# Altium PCB PCB-MM-08-FPS-400-CSW.PcbDoc
Units mm, origin at the board's own origin, x right, y up, seen from the top; angles counter-clockwise.
Board outline 57.02 x 82.04 mm, 2 copper layers (Top Layer, Bottom Layer); 89 components, 61 nets, 291 pads, 108 vias.
Unrouted connection lines stored in the file: 70.
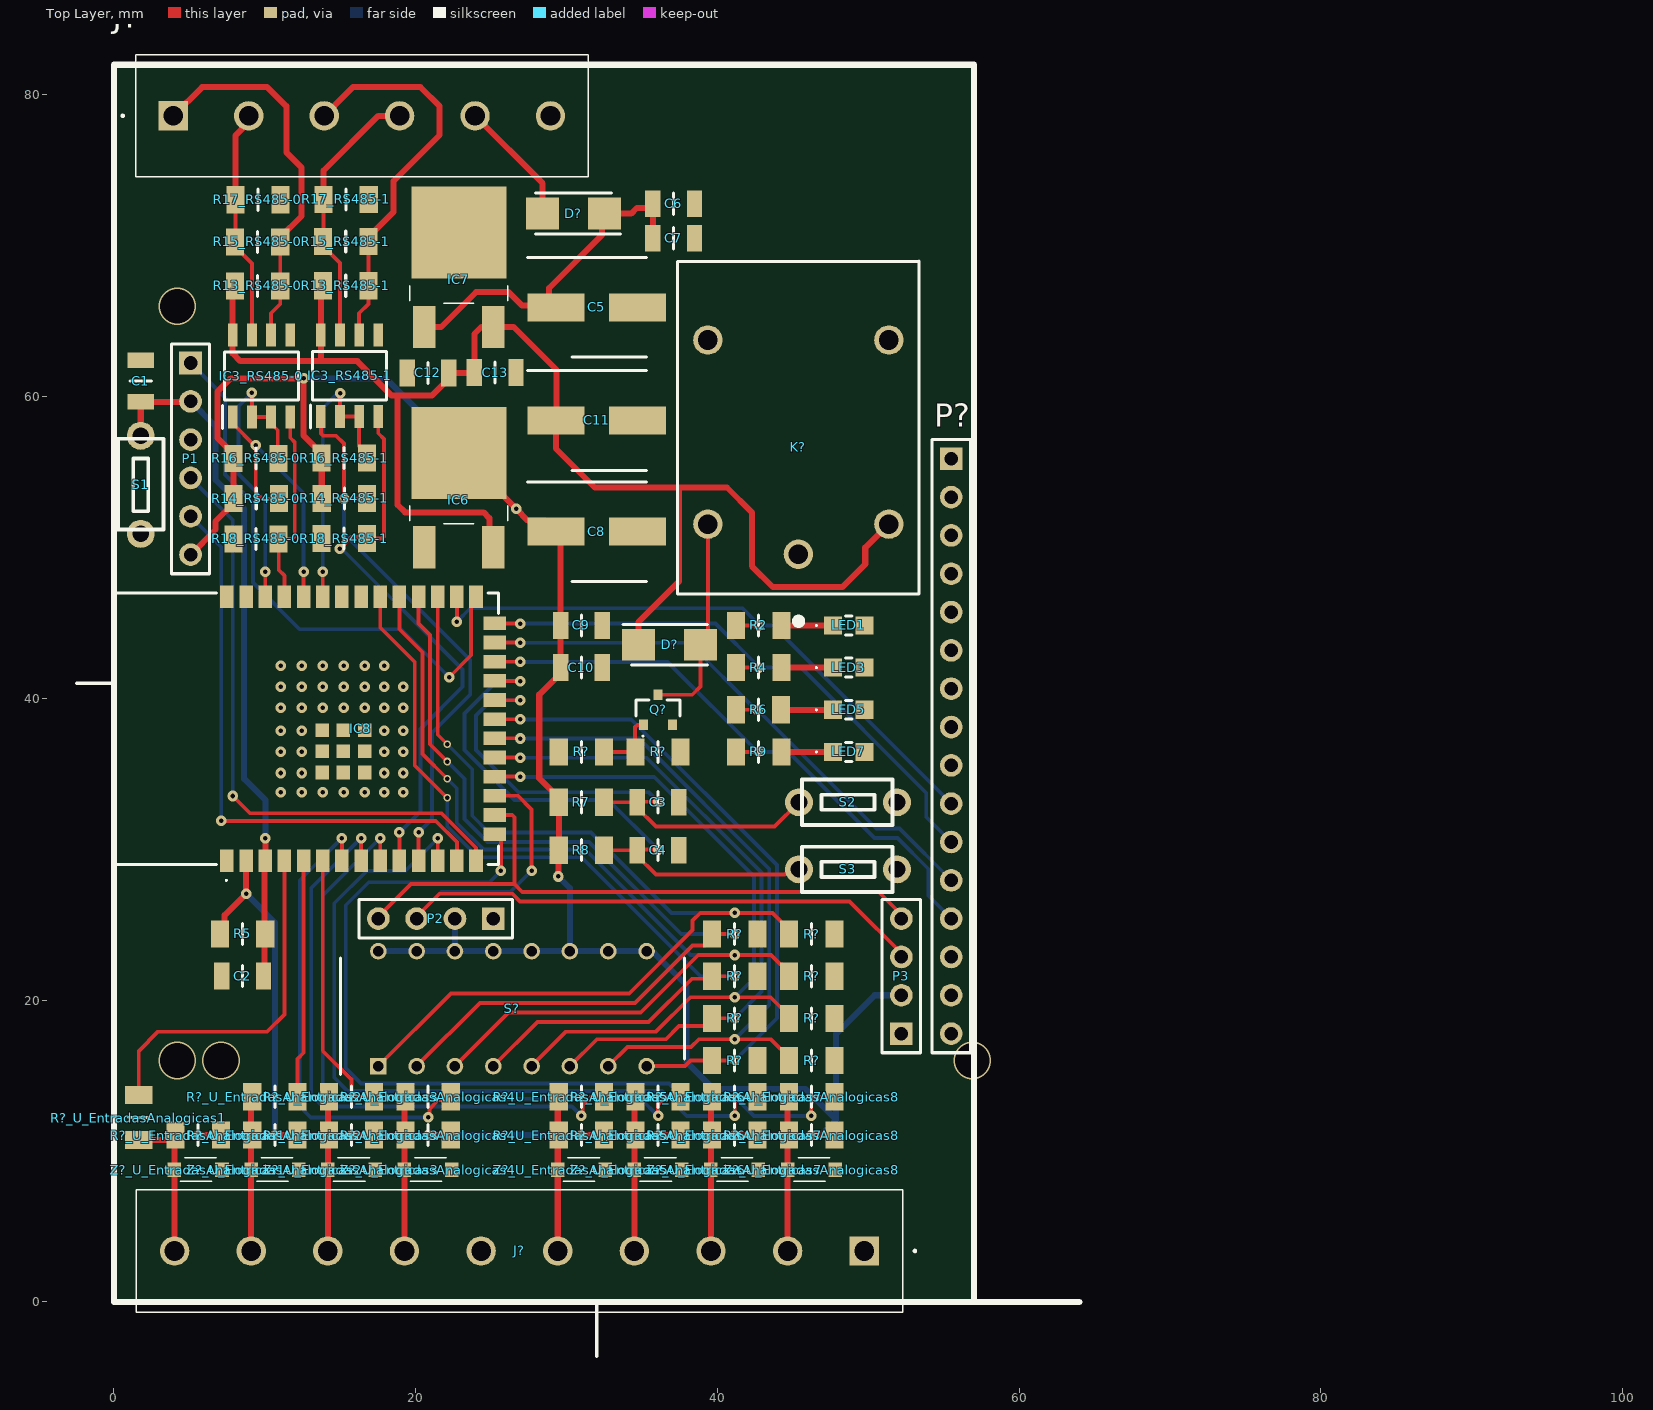
[diagram p0: Top Layer view]
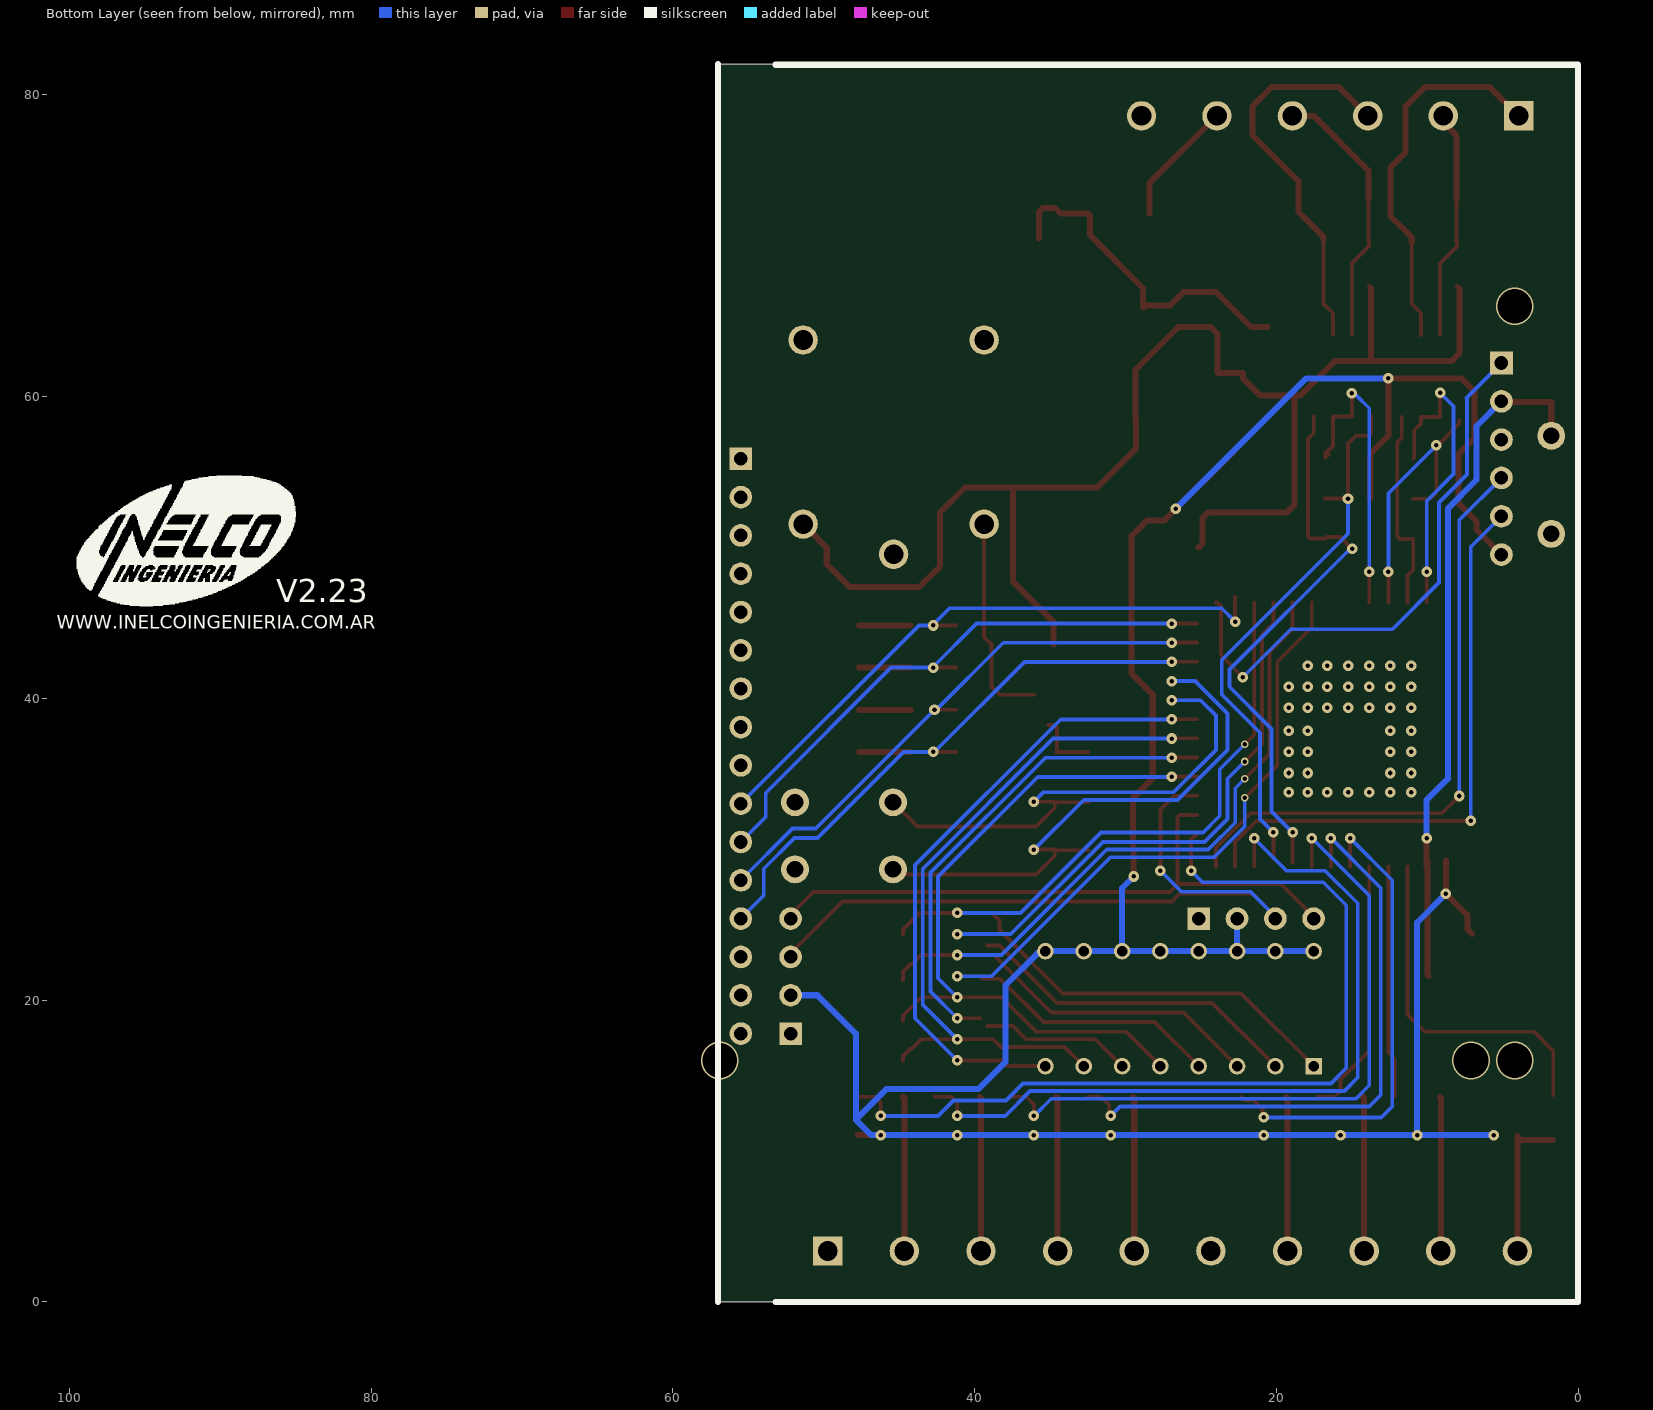
[diagram p1: Bottom Layer view, seen from below]
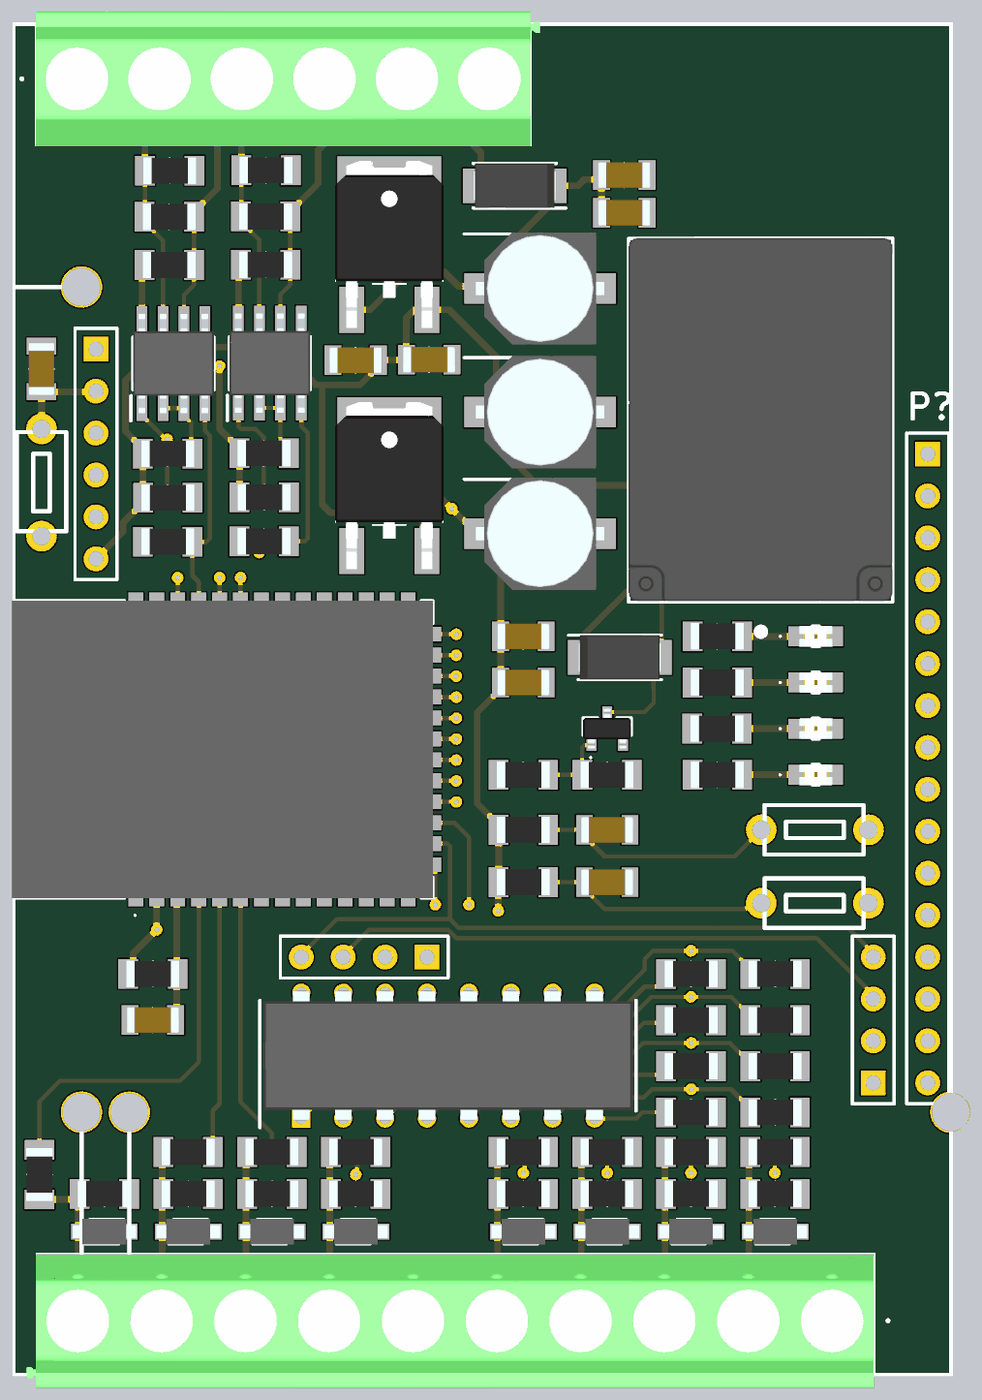
[diagram p2: 3D render of the assembled board from above, using the file's embedded part models]

## Layer stack, top to bottom
Top Solder: solder mask 0.0102, Solder Resist, Dk 3.5
Top Layer: signal copper 0.0356
Dielectric 1: dielectric 0.32, FR-4, Dk 4.8
Bottom Layer: signal copper 0.0356
Bottom Solder: solder mask 0.0102, Solder Resist, Dk 3.5

## Board outline
0,0 57.023,0 57.023,82.042 0,82.042

## Design rules (kind name [scope] priority, off if disabled: settings)
Clearance [All] p1: gap=0.254 ignorepadtopadclearanceinfootprint=FALSE except(0: Arc-Hole Track-Hole SMDPad-Hole THPad-Hole Via-Hole Fill-Hole Poly-Hole Region-Hole Text-Hole; 0.5: THPad-Fill THPad-Poly THPad-Region)
PlaneClearance [All] p1: clearance=2
PlaneConnect [All] p1: planeconnectstyle=Direct reliefexpansion=0.508 reliefentries=4 reliefconductorwidth=0.254 reliefairgap=0.254
PolygonConnect [All] p1: connectstyle=Direct reliefconductorwidth=0.4 reliefentries=4 polygonreliefangle="90 Angle" airgapwidth=0.254
RoomDefinition RS485-0 [InComponentClass('RS485-0')] p1: confinementstyle=ConfineIn formatcopy=TRUE lockcomponents=FALSE outline 6.742,48.897 12.584,48.897 12.584,74.424 6.742,74.424
RoomDefinition RS485-1 [InComponentClass('RS485-1')] p2: confinementstyle=ConfineIn formatcopy=TRUE lockcomponents=FALSE outline 12.584,48.918 18.426,48.918 18.426,74.445 12.584,74.445
RoutingVias [All] p1: holewidth=0.711 width=1.27 viastyle="Through Hole" minholewidth=0.3 minwidth=0.5 maxholewidth=0.711 maxwidth=1.27
SolderMaskExpansion [All] p1: expansion=0.102 istentingtop=FALSE
Width [All] p1: maxlimit=1 minlimit=0.254 preferedwidth=0.4
28 further rules are at their usual default settings.

## Classes and differential pairs
component class U_RELAY: D? K? Q? R?
channel class EntradasAnalogicas: U_EntradasAnalogicas1 U_EntradasAnalogicas2 U_EntradasAnalogicas3 U_EntradasAnalogicas4 U_EntradasAnalogicas5 U_EntradasAnalogicas6 U_EntradasAnalogicas7 U_EntradasAnalogicas8
component class U_EntradasAnalogicas8: R?_U_EntradasAnalogicas8 Z?_U_EntradasAnalogicas8
component class U_EntradasAnalogicas7: R?_U_EntradasAnalogicas7 Z?_U_EntradasAnalogicas7
component class U_EntradasAnalogicas6: R?_U_EntradasAnalogicas6 Z?_U_EntradasAnalogicas6
component class U_EntradasAnalogicas5: R?_U_EntradasAnalogicas5 Z?_U_EntradasAnalogicas5
component class U_EntradasAnalogicas4: R?_U_EntradasAnalogicas4 Z?_U_EntradasAnalogicas4
component class U_EntradasAnalogicas3: R?_U_EntradasAnalogicas3 Z?_U_EntradasAnalogicas3
component class U_EntradasAnalogicas2: R?_U_EntradasAnalogicas2 Z?_U_EntradasAnalogicas2
component class U_EntradasAnalogicas1: R?_U_EntradasAnalogicas1 Z?_U_EntradasAnalogicas1
component class U_Pulsadores: C1 C2 C3 C4 R5 R7 R8 S1 S2 S3
component class U_Leds: LED1 LED3 LED5 LED7 R2 R4 R6 R9
component class U_Conectores: J? P1 P2 P3
component class "MM-08 FPS-400": IC8 P? R? S?
component class U_Fuente: C5 C6 C7 C8 C9 C10 C11 C12 C13 D? IC6 IC7
channel class RS485: RS485-0 RS485-1 RS485-2
component class RS485-0: IC3_RS485-0 R13_RS485-0 R14_RS485-0 R15_RS485-0 R16_RS485-0 R17_RS485-0 R18_RS485-0
component class RS485-1: IC3_RS485-1 R13_RS485-1 R14_RS485-1 R15_RS485-1 R16_RS485-1 R17_RS485-1 R18_RS485-1

## Components (designator, comment, footprint, x,y, rotation, side; value= is the part's Value field where it differs from the comment)
C1 "0.1uF" CAPC3216X100N 1.778,61.034 r90 top
C2 "1uF" CAPC3216X100N 8.533,21.59 r0 top
C3 "1uF" CAPC3216X100N 36.068,33.112 r180 top
C4 "1uF" CAPC3216X100N 36.068,29.937 r180 top
C5 "100uFX16V" CAPAE660X550N 32.004,65.913 r0 top
C6 "10uF/16V(10%)" CAPC3216X100N 37.103,72.786 r0 top
C7 "0.1uF/16V(10%)" CAPC3216X100N 37.103,70.5 r0 top
C8 "100uFX16V" CAPAE660X550N 32.004,51.054 r0 top
C9 "10uF/16V(10%)" CAPC3216X100N 30.988,44.831 r0 top
C10 "0.1uF/16V(10%)" CAPC3216X100N 30.988,42.037 r0 top
C11 "100uFX16V" CAPAE660X550N 32.004,58.42 r0 top
C12 "10uF/16V(10%)" CAPC3216X100N 20.816,61.568 r180 top
C13 "0.1uF/16V(10%)" CAPC3216X100N 25.273,61.595 r0 top
D? "M7A" DIOM5027X262N 36.83,43.561 r0 top
D? "M7A" DIOM5027X262N 30.462,72.136 r180 top
IC3_RS485-0 "SN75176AD" SOIC127P600X175-8N 9.779,61.365 r90 top (schematic designator IC3)
IC3_RS485-1 "SN75176AD" SOIC127P600X175-8N 15.621,61.386 r90 top (schematic designator IC3)
IC6 "LD1117DT33CTR" L7805CDTTR 22.86,56.261 r0 top
IC7 "L7805CDT-TR" L7805CDTTR 22.86,70.866 r0 top
IC8 "ESP32-S3-WROOM-1-N4" ESP32S3WROOM1N4 12.753,37.986 r90 top
J? "1729050" 1729050 3.937,78.613 r0 top
J? "1729209" 1729209 49.739,3.369 r180 top
K? "JS1-12V-F" JS1-12V-F_1 53.37,46.905 r90 top
LED1 "APHCM2012SURCK-F01" APHCM2012SURCKF01 48.71,44.831 r0 top
LED3 "APHCM2012SURCK-F01" APHCM2012SURCKF01 48.71,42.037 r0 top
LED5 "APHCM2012SURCK-F01" APHCM2012SURCKF01 48.71,39.243 r0 top
LED7 "APHCM2012SURCK-F01" APHCM2012SURCKF01 48.71,36.449 r0 top
P1 "Header 6" HDR1X6 5.08,62.23 r270 top
P2 "I2C" HDR1X4 25.146,25.4 r180 top
P3 "RTC" HDR1X4 52.197,17.78 r90 top locked
P? "Header 16" HDR1X16 55.499,55.88 r270 top
Q? "BC817-40" BC81740215 36.068,39.243 r0 top
R2 "1K" RESC3216X75N 42.741,44.831 r0 top
R4 "1K" RESC3216X75N 42.741,42.037 r0 top
R5 "10K" RESC3216X75N 8.533,24.384 r180 top
R6 "1K" RESC3216X75N 42.73,39.243 r0 top
R7 "10K" RESC3216X75N 30.988,33.112 r180 top
R8 "10K" RESC3216X75N 30.988,29.937 r180 top
R9 "1K" RESC3216X75N 42.741,36.449 r0 top
R13_RS485-0 "20K" RESC3216X75N 9.525,67.334 r0 top (schematic designator R13)
R13_RS485-1 "20K" RESC3216X75N 15.367,67.355 r0 top (schematic designator R13)
R14_RS485-0 "10K" RESC3216X75N 9.435,53.237 r0 top (schematic designator R14)
R14_RS485-1 "10K" RESC3216X75N 15.277,53.258 r0 top (schematic designator R14)
R15_RS485-0 "120" RESC3216X75N 9.525,70.255 r180 top (schematic designator R15)
R15_RS485-1 "120" RESC3216X75N 15.367,70.276 r180 top (schematic designator R15)
R16_RS485-0 "1K" RESC3216X75N 9.422,55.904 r0 top (schematic designator R16)
R16_RS485-1 "1K" RESC3216X75N 15.264,55.925 r0 top (schematic designator R16)
R17_RS485-0 "20K" RESC3216X75N 9.549,73.049 r180 top (schematic designator R17)
R17_RS485-1 "20K" RESC3216X75N 15.391,73.07 r180 top (schematic designator R17)
R18_RS485-0 "10K" RESC3216X75N 9.422,50.57 r180 top (schematic designator R18)
R18_RS485-1 "10K" RESC3216X75N 15.264,50.591 r180 top (schematic designator R18)
R? "1K" RESC3216X75N 30.988,36.449 r0 top
R? "10K" RESC3216X75N 36.068,36.449 r180 top
R? "1K" RESC3216X75N 41.148,18.785 r0 top
R? "1K" RESC3216X75N 41.148,21.579 r0 top
R? "1K" RESC3216X75N 46.252,21.579 r0 top
R? "1K" RESC3216X75N 46.252,18.785 r0 top
R? "1K" RESC3216X75N 46.252,15.991 r0 top
R? "1K" RESC3216X75N 46.252,24.373 r0 top
R? "1K" RESC3216X75N 41.148,15.991 r0 top
R? "1K" RESC3216X75N 41.148,24.373 r0 top
R?_U_EntradasAnalogicas1 "39k" RESC3216X75N 1.651,12.216 r90 top (schematic designator R?)
R?_U_EntradasAnalogicas1 "2k7" RESC3216X75N 5.588,11.049 r0 top (schematic designator R?)
R?_U_EntradasAnalogicas2 "2k7" RESC3216X75N 10.668,11.049 r0 top (schematic designator R?)
R?_U_EntradasAnalogicas2 "39k" RESC3216X75N 10.668,13.589 r0 top (schematic designator R?)
R?_U_EntradasAnalogicas3 "2k7" RESC3216X75N 15.748,11.049 r0 top (schematic designator R?)
R?_U_EntradasAnalogicas3 "39k" RESC3216X75N 15.748,13.589 r0 top (schematic designator R?)
R?_U_EntradasAnalogicas4 "39k" RESC3216X75N 20.828,13.589 r0 top (schematic designator R?)
R?_U_EntradasAnalogicas4 "2k7" RESC3216X75N 20.828,11.049 r0 top (schematic designator R?)
R?_U_EntradasAnalogicas5 "39k" RESC3216X75N 30.988,13.589 r0 top (schematic designator R?)
R?_U_EntradasAnalogicas5 "2k7" RESC3216X75N 30.988,11.049 r0 top (schematic designator R?)
R?_U_EntradasAnalogicas6 "39k" RESC3216X75N 36.068,13.589 r0 top (schematic designator R?)
R?_U_EntradasAnalogicas6 "2k7" RESC3216X75N 36.068,11.049 r0 top (schematic designator R?)
R?_U_EntradasAnalogicas7 "2k7" RESC3216X75N 41.148,11.049 r0 top (schematic designator R?)
R?_U_EntradasAnalogicas7 "39k" RESC3216X75N 41.148,13.589 r0 top (schematic designator R?)
R?_U_EntradasAnalogicas8 "2k7" RESC3216X75N 46.252,11.049 r0 top (schematic designator R?)
R?_U_EntradasAnalogicas8 "39k" RESC3216X75N 46.252,13.589 r0 top (schematic designator R?)
S1 "1825965-1" "TAC-SWITCH 2CONT. 3,5X6MM" 1.778,57.404 r270 top
S2 "1825965-1" "TAC-SWITCH 2CONT. 3,5X6MM" 45.408,33.112 r0 top
S3 "1825965-1" "TAC-SWITCH 2CONT. 3,5X6MM" 45.408,28.667 r0 top
S? "A6D-8100" DIP762W50P254L2240H460Q16N 26.416,19.431 r90 top
Z?_U_EntradasAnalogicas1 "MMSZ5226B-7-F" MMSZ5226B7F 5.588,8.763 r0 top (schematic designator Z?)
Z?_U_EntradasAnalogicas2 "MMSZ5226B-7-F" MMSZ5226B7F 10.668,8.763 r0 top (schematic designator Z?)
Z?_U_EntradasAnalogicas3 "MMSZ5226B-7-F" MMSZ5226B7F 15.748,8.763 r0 top (schematic designator Z?)
Z?_U_EntradasAnalogicas4 "MMSZ5226B-7-F" MMSZ5226B7F 20.828,8.763 r0 top (schematic designator Z?)
Z?_U_EntradasAnalogicas5 "MMSZ5226B-7-F" MMSZ5226B7F 30.988,8.763 r0 top (schematic designator Z?)
Z?_U_EntradasAnalogicas6 "MMSZ5226B-7-F" MMSZ5226B7F 36.068,8.763 r0 top (schematic designator Z?)
Z?_U_EntradasAnalogicas7 "MMSZ5226B-7-F" MMSZ5226B7F 41.148,8.763 r0 top (schematic designator Z?)
Z?_U_EntradasAnalogicas8 "MMSZ5226B-7-F" MMSZ5226B7F 46.252,8.763 r0 top (schematic designator Z?)

## Footprints (in the part's own frame and the unit in brackets; to place one, negate y for a bottom-side part, rotate by r counter-clockwise, add the part's x,y. Pads: shape width x height; smd on the part's side, far side on the other; paste and mask are expansions set on the pad)
1729050 [mm]
  rect 1.95x1.95 hole 1.3: 1(0,0)
  round 1.95 hole 1.3: 2(5,0) 3(10,0) 4(15,0) 5(20,0) 6(25,0)
  silkscreen extent -3.4,-4.05 27.5,4.05, body extent -2.51,-4.08 28.06,4.07, height 10.53
1729209 [mm]
  rect 1.95x1.95 hole 1.3: 1(0,0)
  round 1.95 hole 1.3: 2(5.08,0) 3(10.16,0) 4(15.24,0) 5(20.32,0) 6(25.4,0) 7(30.48,0) 8(35.56,0) 9(40.64,0) 10(45.72,0)
  silkscreen extent -3.4,-4.08 48.26,4.08, body extent -2.5,-4.01 48.87,4.09, height 10.39
APHCM2012SURCKF01 [mm]
  rect 1.2x1.2 smd: 1(-1.05,0) 2(1.05,0)
  silkscreen extent -2.2,-0.63 0.2,0.63, body extent -1,-0.63 1,0.63, height 0.5
BC81740215 [mm]
  rect 0.6x0.7 smd: 1(-0.95,-1) 2(0.95,-1) 3(0,1)
  silkscreen extent -1.45,-1.8 1.45,0.65, body extent -1.45,-1.2 1.45,1.2, height 0.95
CAPAE660X550N [mm]
  rect 3.8x1.85 smd: 1(-2.7,0) 2(2.7,0)
  silkscreen extent -4.6,-3.3 3.3,3.3, body extent -3.9,-3.4 3.9,3.4, height 5.5
CAPC3216X100N [mm]
  rect 1.02x1.78 smd: 1(-1.38,0) 2(1.38,0)
  silkscreen extent 0,-0.7 0,0.7, body extent -1.6,-0.8 1.6,0.8, height 1
DIOM5027X262N [mm]
  rect 2.2x2.1 smd: 1(-2.05,0) 2(2.05,0)
  silkscreen extent -3.1,-1.35 2.52,1.35, body extent -2.52,-1.35 2.52,1.35, height 2.62
DIP762W50P254L2240H460Q16N [mm]
  rect 1.1x1.1 hole 0.7: 1(-3.81,8.89)
  round 1.1 hole 0.7: 2(-3.81,6.35) 3(-3.81,3.81) 4(-3.81,1.27) 5(-3.81,-1.27) 6(-3.81,-3.81) 7(-3.81,-6.35) 8(-3.81,-8.89) 9(3.81,-8.89) 10(3.81,-6.35) 11(3.81,-3.81) 12(3.81,-1.27) 13(3.81,1.27) 14(3.81,3.81) 15(3.81,6.35) 16(3.81,8.89)
  silkscreen extent -4.36,-11.4 3.35,11.4, body extent -3.94,-11.2 3.94,11.2, height 4.6
ESP32S3WROOM1N4 [mm]
  rect 1.5x0.9 smd: 1(-8.75,5.26) 2(-8.75,3.99) 3(-8.75,2.72) 4(-8.75,1.45) 5(-8.75,0.18) 6(-8.75,-1.09) 7(-8.75,-2.36) 8(-8.75,-3.63) 9(-8.75,-4.9) 10(-8.75,-6.17) 11(-8.75,-7.44) 12(-8.75,-8.71) 13(-8.75,-9.98) 14(-8.75,-11.25) 27(8.75,-11.25) 28(8.75,-9.98) 29(8.75,-8.71) 30(8.75,-7.44) 31(8.75,-6.17) 32(8.75,-4.9) 33(8.75,-3.63) 34(8.75,-2.36) 35(8.75,-1.09) 36(8.75,0.18) 37(8.75,1.45) 38(8.75,2.72) 39(8.75,3.99) 40(8.75,5.26)
  rect 0.9x1.5 smd: 15(-6.985,-12.5) 16(-5.715,-12.5) 17(-4.445,-12.5) 18(-3.175,-12.5) 19(-1.905,-12.5) 20(-0.635,-12.5) 21(0.635,-12.5) 22(1.905,-12.5) 23(3.175,-12.5) 24(4.445,-12.5) 25(5.715,-12.5) 26(6.985,-12.5)
  rect 0.9x0.9 smd: 41(-1.5,-2.46) 42(-2.9,-1.06) 43(-2.9,-2.46) 44(-2.9,-3.86) 45(-1.5,-3.86) 46(-0.1,-3.86) 47(-0.1,-2.46) 48(-0.1,-1.06) 49(-1.5,-1.06)
  silkscreen extent -10.1,-12.75 9,12.75, body extent -9,-12.75 9,12.75, height 3.35
HDR1X4 [mm] "Connector; Header; 4 Position"
  rect 1.5x1.5 hole 0.9: 1(0,0)
  round 1.5 hole 0.9: 2(2.54,0) 3(5.08,0) 4(7.62,0)
  silkscreen extent -1.27,-1.27 8.89,1.27
HDR1X6 [mm] "Connector; Header; 6 Position"
  rect 1.5x1.5 hole 0.9: 1(0,0)
  round 1.5 hole 0.9: 2(2.54,0) 3(5.08,0) 4(7.62,0) 5(10.16,0) 6(12.7,0)
  silkscreen extent -1.27,-1.27 13.97,1.27
HDR1X16 [mm] "Connector; Header; 16 Position"
  rect 1.5x1.5 hole 0.9: 1(0,0)
  round 1.5 hole 0.9: 2(2.54,0) 3(5.08,0) 4(7.62,0) 5(10.16,0) 6(12.7,0) 7(15.24,0) 8(17.78,0) 9(20.32,0) 10(22.86,0) 11(25.4,0) 12(27.94,0) 13(30.48,0) 14(33.02,0) 15(35.56,0) 16(38.1,0)
  silkscreen extent -1.27,-1.27 39.37,1.27
JS1-12V-F_1 [mm]
  round 1.95 hole 1.3: 1(2.649,8) 2(4.649,14) 3(16.849,14) 4(16.849,2) 5(4.649,2)
  silkscreen extent -1.98,0 22.07,16, body extent 0.07,0 22.07,16, height 16.9
L7805CDTTR [mm]
  rect 1.5x2.8 smd: 1(-2.286,-6.25) 3(2.286,-6.25)
  rect 6.3x6.1 smd: 2(0,0)
  silkscreen extent -3.25,-4.68 3.25,-3.5, body extent -3.3,-7.38 3.3,2.78, height 2.63
MMSZ5226B7F [mm]
  rect 0.9x0.95 smd: 1(-1.575,0) 2(1.575,0)
  silkscreen extent -1.2,-0.77 1.2,0.77, body extent -1.93,-0.77 1.93,0.77, height 1.55
RESC3216X75N [mm]
  rect 1.2x1.8 smd: 1(-1.5,0) 2(1.5,0)
  silkscreen extent 0,-0.7 0,0.7, body extent -1.6,-0.8 1.6,0.8, height 0.75
SOIC127P600X175-8N [mm]
  rect 1.525x0.65 smd: 1(-2.712,1.905) 2(-2.712,0.635) 3(-2.712,-0.635) 4(-2.712,-1.905) 5(2.712,-1.905) 6(2.712,-0.635) 7(2.712,0.635) 8(2.712,1.905)
  silkscreen extent -3.47,-2.45 1.6,2.58, body extent -3,-2.45 3,2.45, height 1.75
"TAC-SWITCH 2CONT. 3,5X6MM" [mm]
  round 1.85 hole 1.1: 1(0,0) 2(6.5,0)
  silkscreen extent 0.2,-1.5 6.2,1.5

## Part data
C1 C2 C3 C4 C6 C7 C9 C10 C12 C13: library part CL31B104KBCNNNC, "100NFX50V X7R 10% CER.MULT. SMD 1206", Manufacturer_Name="Samsung Electro-Mechanics", Mouser Part Number=187-CL31B104KBCNNNC, Arrow Part Number=CL31B104KBCNNNC, Arrow Price/Stock=https://www.arrow.com/en/products/cl31b104kbcnnnc/samsung-electro-mechanics?region=nac, Datasheet Link=https://datasheet.datasheetarchive.com/originals/distributors/Datasheets_SAMA/0fdb6a11e020a7299f4d0713dd2bd7ee.pdf, Height=1mm, Manufacturer_Part_Number=CL31B104KBCNNNC, Mouser Price/Stock=https://www.mouser.co.uk/ProductDetail/Samsung-Electro-Mechanics/CL31B104KBCNNNC?qs=349EhDEZ59oHABbyGq1iKA%3D%3D
C5 C8 C11: library part NACE101M16V6.3X5.5TR13F, "100UFX16V 20%. 6.3x5.4 ELE.RAD.SMD", Manufacturer_Name="NIC Components", Arrow Part Number=NACE101M16V6.3X5.5TR13F, Arrow Price/Stock=https://www.arrow.com/en/products/nace101m16v6.3x5.5tr13f/nic-components, Datasheet Link=http://uk.rs-online.com/web/p/products/7379631, Height=5.5mm, Manufacturer_Part_Number=NACE101M16V6.3X5.5TR13F
D? D?: "Diode", Manufacturer_Name="HY Electronic", Height=2.62mm, Manufacturer_Part_Number=M7A
IC3_RS485-0 IC3_RS485-1: "Integrated Circuit", Manufacturer_Name="Texas Instruments", Mouser Part Number=595-SN75176AD, Arrow Part Number=SN75176AD, Arrow Price/Stock=https://www.arrow.com/en/products/sn75176ad/texas-instruments?region=nac, Datasheet Link=http://www.ti.com/lit/ds/symlink/sn75176a.pdf, Height=1.75mm, Manufacturer_Part_Number=SN75176AD, Mouser Price/Stock=https://www.mouser.co.uk/ProductDetail/Texas-Instruments/SN75176AD?qs=FetendrIl6upbSVFRObzhQ%3D%3D
IC6: "TO-252-3/DPACK 0.95A 3.3V", Manufacturer_Name=STMicroelectronics, Mouser Part Number=511-LD1117DT33C-TR, Arrow Part Number=LD1117DT33CTR, Arrow Price/Stock=https://www.arrow.com/en/products/ld1117dt33ctr/stmicroelectronics?region=nac, Datasheet Link=https://www.st.com/resource/en/datasheet/ld1117.pdf, Height=2.48mm, Manufacturer_Part_Number=LD1117DT33CTR, Mouser Price/Stock=https://www.mouser.co.uk/ProductDetail/STMicroelectronics/LD1117DT33CTR?qs=rUxiu3TV3%2FNm%2FOyb7vJzpg%3D%3D
IC7: "Integrated Circuit", Manufacturer_Name=STMicroelectronics, Mouser Part Number=511-L7805CDT-TR, Arrow Part Number=L7805CDT-TR, Arrow Price/Stock=https://www.arrow.com/en/products/l7805cdt-tr/stmicroelectronics?region=europe, Datasheet Link=https://componentsearchengine.com/Datasheets/2/L7805CDT-TR.pdf, Height=2.63mm, Manufacturer_Part_Number=L7805CDT-TR, Mouser Price/Stock=https://www.mouser.co.uk/ProductDetail/STMicroelectronics/L7805CDT-TR?qs=gq%2F78KzUDX67VndS%2FbSB4Q%3D%3D
IC8: "Integrated Circuit", Manufacturer_Name="Espressif Systems", Mouser Part Number=356-ESP32-S3WROOM1N4, Datasheet Link=https://www.espressif.com/sites/default/files/documentation/esp32-s3-wroom-1_wroom-1u_datasheet_en.pdf, Height=3.25mm, Manufacturer_Part_Number=ESP32-S3-WROOM-1-N4, Mouser Price/Stock=https://www.mouser.co.uk/ProductDetail/Espressif-Systems/ESP32-S3-WROOM-1-N4?qs=Li%252BoUPsLEnsO%2FkiJOUK0FQ%3D%3D
J?: "Connector", Manufacturer_Name="Phoenix Contact", Mouser Part Number=651-1729050, Arrow Part Number=1729050, Arrow Price/Stock=https://www.arrow.com/en/products/1729050/phoenix-contact?region=nac, Datasheet Link=http://www.phoenixcontact.com/de/produkte/1729050/pdf, Height=10.15mm, Manufacturer_Part_Number=1729050, Mouser Price/Stock=https://www.mouser.co.uk/ProductDetail/Phoenix-Contact/1729050?qs=cq3Rj917t3laRrRfXpB0kg%3D%3D
J?: "Connector", Manufacturer_Name="Phoenix Contact", Mouser Part Number=651-1729209, Datasheet Link=http://www.phoenixcontact.com/de/produkte/1729209/pdf, Height=10.15mm, Manufacturer_Part_Number=1729209, Mouser Price/Stock=https://www.mouser.co.uk/ProductDetail/Phoenix-Contact/1729209?qs=DAHzmYU9cu26iNG3nw7bXQ%3D%3D
K?: "Relay or Contactor", Manufacturer_Name=Panasonic, Mouser Part Number=769-JS1-12V-F, Arrow Part Number=JS1-12V-F, Arrow Price/Stock=https://www.arrow.com/en/products/js1-12v-f/panasonic, Datasheet Link=https://datasheet.datasheetarchive.com/originals/distributors/Datasheets-24/DSA-473864.pdf, Manufacturer_Part_Number=JS1-12V-F, Mouser Price/Stock=https://www.mouser.co.uk/ProductDetail/Panasonic-Industrial-Devices/JS1-12V-F?qs=UO%2Fx91QLkSAl%252Bp0dnjREtA%3D%3D
LED1 LED3 LED5 LED7: "LED", Manufacturer_Name=Kingbright, Mouser Part Number=604-APHCM2012SURCK, Arrow Part Number=APHCM2012SURCK-F01, Arrow Price/Stock=https://www.arrow.com/en/products/aphcm2012surck-f01/kingbright?region=nac, Datasheet Link=https://componentsearchengine.com/Datasheets/1/APHCM2012SURCK-F01.pdf, Height=0.5mm, Manufacturer_Part_Number=APHCM2012SURCK-F01, Mouser Price/Stock=https://www.mouser.co.uk/ProductDetail/Kingbright/APHCM2012SURCK-F01?qs=qqKal61G0Kww4v8qUa%2Fyzg%3D%3D
P1: "Header, 6-Pin", LatestRevisionDate=17-Jul-2002, LatestRevisionNote="Re-released for DXP Platform.", Publisher="Altium Limited"
P2 P3: library part "Header 4", "Header, 4-Pin", LatestRevisionDate=17-Jul-2002, LatestRevisionNote="Re-released for DXP Platform.", Publisher="Altium Limited"
P?: "Header, 16-Pin", LatestRevisionDate=17-Jul-2002, LatestRevisionNote="Re-released for DXP Platform.", Publisher="Altium Limited"
Q?: library part BC817-40,215, "Transistor BJT NPN", Manufacturer_Name=Nexperia, Mouser Part Number=771-BC817-40-T/R, Arrow Part Number=BC817-40,215, Arrow Price/Stock=https://www.arrow.com/en/products/bc817-40215/nexperia?region=nac, Datasheet Link=https://assets.nexperia.com/documents/data-sheet/BC817_SER.pdf, Height=1.1mm, Manufacturer_Part_Number=BC817-40,215, Mouser Price/Stock=https://www.mouser.co.uk/ProductDetail/Nexperia/BC817-40215?qs=me8TqzrmIYU%252B245p8hOLaQ%3D%3D
R2 R4 R5 R6 R7 R8 R9 R13_RS485-0 R13_RS485-1 R14_RS485-0 R14_RS485-1 R15_RS485-0 R15_RS485-1 R16_RS485-0 R16_RS485-1 R17_RS485-0 R17_RS485-1 R18_RS485-0 R18_RS485-1 R? R? R? R? R? R? R? R? R? R? R?_U_EntradasAnalogicas1 R?_U_EntradasAnalogicas1 R?_U_EntradasAnalogicas2 R?_U_EntradasAnalogicas2 R?_U_EntradasAnalogicas3 R?_U_EntradasAnalogicas3 R?_U_EntradasAnalogicas4 R?_U_EntradasAnalogicas4 R?_U_EntradasAnalogicas5 R?_U_EntradasAnalogicas5 R?_U_EntradasAnalogicas6 R?_U_EntradasAnalogicas6 R?_U_EntradasAnalogicas7 R?_U_EntradasAnalogicas7 R?_U_EntradasAnalogicas8 R?_U_EntradasAnalogicas8: library part CR1206-F_-2R00ELF, "Resistor", Manufacturer_Name=Bourns, Manufacturer_Part_Number=CR1206-F/-2R00ELF, Mouser Part Number=652-CR1206-F/2R00ELF, Height=0.75mm, Mouser Price/Stock=https://www.mouser.co.uk/ProductDetail/Bourns/CR1206-F-2R00ELF?qs=W%2FMpXkg%252BdQ47Z%2FeZv1nDSg%3D%3D
S1 S2 S3: "Switch", Manufacturer_Name="TE Connectivity", Arrow Part Number=1825965-1, Arrow Price/Stock=https://www.arrow.com/en/products/1825965-1/te-connectivity?region=nac, Datasheet Link=https://www.arrow.com/en/products/1825965-1/te-connectivity, Height=5mm, Manufacturer_Part_Number=1825965-1
S?: "Switch", Manufacturer_Name="Omron Electronics", Mouser Part Number=653-A6D-8100, Arrow Part Number=A6D-8100, Arrow Price/Stock=https://www.arrow.com/en/products/a6d8100/omron, Datasheet Link=https://omronfs.omron.com/en_US/ecb/products/pdf/en-a6d_a6dr.pdf, Height=4.6mm, Manufacturer_Part_Number=A6D-8100, Mouser Price/Stock=https://www.mouser.co.uk/ProductDetail/Omron-Electronics/A6D-8100?qs=kyocjfxn8Ip0P%252BNDPgdanQ%3D%3D
Z?_U_EntradasAnalogicas1 Z?_U_EntradasAnalogicas2 Z?_U_EntradasAnalogicas3 Z?_U_EntradasAnalogicas4 Z?_U_EntradasAnalogicas5 Z?_U_EntradasAnalogicas6 Z?_U_EntradasAnalogicas7 Z?_U_EntradasAnalogicas8: "Zener Diode", Manufacturer_Name="Diodes Inc.", Mouser Part Number=621-MMSZ5226B-F, Arrow Part Number=MMSZ5226B-7-F, Arrow Price/Stock=https://www.arrow.com/en/products/mmsz5226b-7-f/diodes-incorporated?region=europe, Datasheet Link=https://www.arrow.com/en/products/mmsz5226b-7-f/diodes-incorporated, Height=1.45mm, Manufacturer_Part_Number=MMSZ5226B-7-F, Mouser Price/Stock=https://www.mouser.co.uk/ProductDetail/Diodes-Incorporated/MMSZ5226B-7-F?qs=KJYV4z76NkUw6Rc9yJaACw%3D%3D

## Via types
v1: diameter 0.7, hole 0.3, Top Layer to Bottom Layer, 100 vias
v2: diameter 0.5, hole 0.3, Top Layer to Bottom Layer, 4 vias
v3: diameter 2.5, hole 2.3, Top Layer to Bottom Layer, 4 vias

## Nets (pads, with @x,y where several pads share a name; then routed paths per layer and width w, separated by ;. In a path a pad name is that pad's centre, name@x,y a point inside that pad or via, vN(x,y) a via of type N, cw(c..) or ccw(c..) an arc to the next point about the centre after c; other vN are vias at no path point)
+3V3: C8.1 C9.1 C10.1 IC6.2 IC8.2 P1.6 P2.2 P3.2 R5.2 R7.2 R8.2 R14_RS485-0.1 R14_RS485-1.1 R16_RS485-0.1 R16_RS485-1.1 R?_U_EntradasAnalogicas1.2@7.088,11.049 R?_U_EntradasAnalogicas2.2@12.168,11.049 R?_U_EntradasAnalogicas3.2@17.248,11.049 R?_U_EntradasAnalogicas4.2@22.328,11.049 R?_U_EntradasAnalogicas5.2@32.488,11.049 R?_U_EntradasAnalogicas6.2@37.568,11.049 R?_U_EntradasAnalogicas7.2@42.648,11.049 R?_U_EntradasAnalogicas8.2@47.752,11.049 S?.9 S?.10 S?.11 S?.12 S?.13 S?.14 S?.15 S?.16 | length 211.2
  Top Layer w0.4: P1.6 6.731,51.181 6.731,51.733 7.935,52.937 7.935,55.891 R16_RS485-0.1 7.922,56.204 6.858,57.268 6.858,60.325 7.747,61.214 v1(12.573,61.214) 12.573,57.416 13.764,56.225 R16_RS485-1.1 13.777,55.912 R14_RS485-1.1 ; v1(5.588,11.049) R?_U_EntradasAnalogicas1.2@7.088,11.049 ; R5.2 7.339,24.69 7.339,25.627 v1(8.763,27.051) IC8.2 ; v1(10.668,11.049) R?_U_EntradasAnalogicas2.2@12.168,11.049 ; v1(15.748,11.049) R?_U_EntradasAnalogicas3.2@17.248,11.049 ; v1(20.828,11.049) R?_U_EntradasAnalogicas4.2@22.328,11.049 ; IC6.2 22.96,56.261 v1(26.656,52.564) 27.442,51.779 28.579,51.779 C8.1 29.608,50.75 C9.1 C10.1 29.608,41.657 28.194,40.243 28.194,34.706 29.488,33.412 R8.2 29.464,29.913 v1(29.464,28.194) ; v1(30.988,11.049) R?_U_EntradasAnalogicas5.2@32.488,11.049 ; v1(36.068,11.049) R?_U_EntradasAnalogicas6.2@37.568,11.049 ; v1(41.148,11.049) R?_U_EntradasAnalogicas7.2@42.648,11.049 ; v1(46.228,11.049) R?_U_EntradasAnalogicas8.2@47.752,11.049
  Bottom Layer w0.4: v1(5.588,11.049) v1(10.668,11.049) ; v1(8.763,27.051) 10.668,25.146 v1(10.668,11.049) ; v1(12.573,61.214) 18.007,61.214 v1(26.656,52.564) ; S?.16 S?.15 S?.14 ; P2.2@22.479,25.4 P2.2@22.526,25.447 ; P2.2 S?.14 ; v1(29.464,28.194) 30.226,27.432 S?.11 ; P3.2@52.451,20.32 50.419,20.32 47.879,17.78 47.879,12.065 ; v1(10.668,11.049) v1(15.748,11.049) v1(20.828,11.049) v1(30.988,11.049) v1(36.068,11.049) v1(41.148,11.049) v1(46.228,11.049) 46.863,11.049 47.879,12.065 ; S?.14 S?.13 S?.12 S?.11 ; S?.11 S?.10 S?.9 35.44,23.107 35.821,23.107 37.959,20.969 37.959,15.889 39.751,14.097 45.847,14.097 47.879,12.065
+5V: C11.1 C12.1 C13.1 D?.1@34.78,43.561 IC3_RS485-0.8 IC3_RS485-1.8 IC6.3 IC7.3 K?.5 P?.3 P?.4 R13_RS485-0.1 R13_RS485-1.1 | length 99.7
  Top Layer w0.254: R13_RS485-0.1@7.874,67.183 R13_RS485-0.1 ; R13_RS485-1.1@13.716,67.204 R13_RS485-1.1
  Top Layer w0.4: R13_RS485-0.1@7.874,67.183 IC3_RS485-0.8 7.874,62.865 8.382,62.357 16.129,62.357 18.415,60.071 18.796,60.071 ; 13.716,62.507 IC3_RS485-1.8 R13_RS485-1.1@13.716,67.204 ; IC6.3 24.892,50.265 24.892,51.943 24.511,52.324 19.304,52.324 18.796,52.832 18.796,60.071 ; D?.1@34.78,43.561 34.78,45.067 37.465,47.752 37.465,53.975 ; K?.5 49.804,49.988 49.804,48.895 48.28,47.371 43.688,47.371 42.291,48.768 42.291,52.324 40.64,53.975 37.465,53.975 ; 18.796,60.071 21.079,60.071 22.196,61.188 C12.1 23.866,61.568 C13.1 23.893,64.152 24.357,64.616 IC7.3 26.496,64.616 29.337,61.775 29.337,58.453 C11.1 29.304,56.548 31.877,53.975 37.465,53.975
+12V: C5.1 C6.1 C7.1 D?.1@32.512,72.136 IC7.1 | length 22.6
  Top Layer w0.4: IC7.1 21.69,64.616 24.003,66.929 26.162,66.929 27.038,66.053 28.656,66.053 28.796,65.913 28.85,65.967 28.85,67.204 32.366,70.72 32.366,71.99 32.512,72.136 34.29,72.136 34.671,72.517 35.454,72.517 35.723,72.248 C7.1
+12VB: D?.2@28.412,72.136 J?.5@23.937,78.613 | length 8.3
  Top Layer w0.4: J?.5@23.937,78.613 28.412,74.138 D?.2@28.412,72.136
A_0: IC3_RS485-0.6 J?.1@3.937,78.613 R13_RS485-0.2 R15_RS485-0.1 | length 25.2
  Top Layer w0.254: IC3_RS485-0.6 10.414,65.532 11.025,66.143 R13_RS485-0.2 R15_RS485-0.1
  Top Layer w0.4: J?.1@3.937,78.613 5.842,80.518 10.16,80.518 11.43,79.248 11.43,76.2 12.446,75.184 12.446,71.976 11.025,70.555 R15_RS485-0.1
A_1: IC3_RS485-1.6 J?.3@13.937,78.613 R13_RS485-1.2 R15_RS485-1.1 | length 26.3
  Top Layer w0.254: IC3_RS485-1.6 16.256,65.532 16.867,66.143 R13_RS485-1.2 R15_RS485-1.1 R15_RS485-1.1@16.867,70.426
  Top Layer w0.4: J?.3@13.937,78.613 15.842,80.518 20.32,80.518 21.59,79.248 21.59,77.343 18.542,74.295 18.542,72.251 16.867,70.576 R15_RS485-1.1@16.867,70.426
AI_1: IC8.4 R?_U_EntradasAnalogicas1.2@1.651,13.716 | length 23.4
  Top Layer w0.254: R?_U_EntradasAnalogicas1.2@1.651,13.716 1.651,16.637 2.921,17.907 10.16,17.907 11.303,19.05 IC8.4@11.303,28.855
AI_2: IC8.5 R?_U_EntradasAnalogicas2.2@12.168,13.589 | length 15.4
  Top Layer w0.254: R?_U_EntradasAnalogicas2.2@12.168,13.589 12.168,16.105 12.573,16.51 IC8.5@12.573,28.855
AI_3: IC8.6 R?_U_EntradasAnalogicas3.2@17.248,13.589 | length 17.3
  Top Layer w0.254: IC8.6@13.843,28.855 13.843,16.637 15.748,14.732 15.748,13.97 16.129,13.589 R?_U_EntradasAnalogicas3.2@17.248,13.589
AI_4: IC8.7 R?_U_EntradasAnalogicas4.2@22.328,13.589 | length 32
  Top Layer w0.254: IC8.7@15.113,28.855 v1(15.113,30.734) ; v1(20.828,12.223) 20.913,12.308 20.913,12.785 21.496,13.368 22.107,13.368 R?_U_EntradasAnalogicas4.2@22.328,13.589
  Bottom Layer w0.254: v1(15.113,30.734) 12.319,27.94 12.319,12.954 13.05,12.223 v1(20.828,12.223)
AI_5: IC8.8 R?_U_EntradasAnalogicas5.2@32.488,13.589 | length 41.1
  Top Layer w0.254: IC8.8@16.383,28.855 v1(16.383,30.734) ; v1(30.988,12.319) 31.073,12.404 31.073,13.039 31.623,13.589 R?_U_EntradasAnalogicas5.2@32.488,13.589
  Bottom Layer w0.254: v1(16.383,30.734) 13.081,27.432 13.081,13.716 13.843,12.954 30.353,12.954 v1(30.988,12.319)
AI_6: IC8.9 R?_U_EntradasAnalogicas6.2@37.568,13.589 | length 45.4
  Top Layer w0.254: IC8.9@17.653,28.855 v1(17.653,30.734) ; v1(36.068,12.319) 36.068,13.081 36.576,13.589 R?_U_EntradasAnalogicas6.2@37.568,13.589
  Bottom Layer w0.254: v1(17.653,30.734) 13.843,26.924 13.843,14.351 14.732,13.462 34.925,13.462 v1(36.068,12.319)
AI_7: IC8.12 R?_U_EntradasAnalogicas7.2@42.648,13.589 | length 52.2
  Top Layer w0.254: IC8.12@21.463,28.855 v1(21.463,30.716) ; v1(41.148,12.319) 41.148,13.208 41.529,13.589 R?_U_EntradasAnalogicas7.2@42.648,13.589
  Bottom Layer w0.254: v1(21.463,30.716) 19.322,28.575 16.764,28.575 14.605,26.416 14.605,14.859 15.494,13.97 36.322,13.97 37.973,12.319 v1(41.148,12.319)
AI_8: IC8.15 R?_U_EntradasAnalogicas8.2@47.752,13.589 | length 59.4
  Top Layer w0.254: IC8.15 25.654,30.678 v1(25.654,28.575) ; v1(46.228,12.319) 46.228,13.208 46.609,13.589 R?_U_EntradasAnalogicas8.2@47.752,13.589
  Bottom Layer w0.254: v1(25.654,28.575) 24.892,27.813 16.891,27.813 15.367,26.289 15.367,15.494 16.383,14.478 36.787,14.478 37.93,13.335 41.402,13.335 42.418,12.319 v1(46.228,12.319)
AIB_1: J?.10 R?_U_EntradasAnalogicas1.1 Z?_U_EntradasAnalogicas1.1 | length 10.1
  Top Layer w0.4: R?_U_EntradasAnalogicas1.1@1.651,10.716 3.755,10.716 4.019,10.98 J?.10
AIB_2: J?.9 R?_U_EntradasAnalogicas2.1 Z?_U_EntradasAnalogicas2.1 | length 10.2
  Top Layer w0.4: J?.9 9.099,13.52 R?_U_EntradasAnalogicas2.1@9.168,13.589
AIB_3: J?.8 R?_U_EntradasAnalogicas3.1 Z?_U_EntradasAnalogicas3.1 | length 10.2
  Top Layer w0.4: J?.8 14.179,13.52 R?_U_EntradasAnalogicas3.1@14.248,13.589
AIB_4: J?.7 R?_U_EntradasAnalogicas4.1 Z?_U_EntradasAnalogicas4.1 | length 10.2
  Top Layer w0.4: J?.7 19.259,13.52 R?_U_EntradasAnalogicas4.1@19.328,13.589
AIB_5: J?.5@29.419,3.369 R?_U_EntradasAnalogicas5.1 Z?_U_EntradasAnalogicas5.1 | length 10.2
  Top Layer w0.4: J?.5@29.419,3.369 29.419,13.52 R?_U_EntradasAnalogicas5.1@29.488,13.589
AIB_6: J?.4@34.499,3.369 R?_U_EntradasAnalogicas6.1 Z?_U_EntradasAnalogicas6.1 | length 10.2
  Top Layer w0.4: J?.4@34.499,3.369 34.499,8.763 34.499,11.049 34.499,13.52 R?_U_EntradasAnalogicas6.1@34.568,13.589
AIB_7: J?.3@39.579,3.369 R?_U_EntradasAnalogicas7.1 Z?_U_EntradasAnalogicas7.1 | length 10.2
  Top Layer w0.4: J?.3@39.579,3.369 39.579,13.52 R?_U_EntradasAnalogicas7.1@39.648,13.589
AIB_8: J?.2@44.659,3.369 R?_U_EntradasAnalogicas8.1 Z?_U_EntradasAnalogicas8.1 | length 10.3
  Top Layer w0.4: J?.2@44.659,3.369 44.659,8.763 44.659,11.049 44.659,13.496 R?_U_EntradasAnalogicas8.1@44.752,13.589
B_0: IC3_RS485-0.7 J?.2@8.937,78.613 R15_RS485-0.2 R17_RS485-0.2 | length 15.4
  Top Layer w0.254: R17_RS485-0.2 8.049,70.279 R15_RS485-0.2 8.025,69.955 9.144,68.836 IC3_RS485-0.7
  Top Layer w0.4: R17_RS485-0.2 8.049,77.306 8.937,78.194 J?.2@8.937,78.613
B_1: IC3_RS485-1.7 J?.4@18.937,78.613 R15_RS485-1.2 R17_RS485-1.2 | length 17.9
  Top Layer w0.254: R17_RS485-1.2 13.891,70.3 R15_RS485-1.2 13.867,69.976 14.986,68.857 IC3_RS485-1.7
  Top Layer w0.4: R17_RS485-1.2 13.891,74.978 17.526,78.613 J?.4@18.937,78.613
CHIP-EN: C1.1 C2.2 IC8.3 P1.2 R5.1 S1.1 | length 46.3
  Top Layer w0.4: S1.1@1.778,57.023 S1.1 1.778,59.646 P1.2@4.87,59.646 ; C2.2 9.973,21.65 9.973,29.176 IC8.3 ; IC8.3@10.033,28.855 v1(10.033,30.734)
  Bottom Layer w0.4: P1.2 6.731,58.039 6.731,54.483 8.636,52.578 8.636,34.671 10.033,33.274 v1(10.033,30.734)
GND: C1.2 C2.1 C3.1 C4.1 C5.2 C6.2 C7.2 C8.2 C9.2 C10.2 C11.2 C12.2 C13.2 IC3_RS485-0.5 IC3_RS485-1.5 IC6.1 IC7.2 IC8.1 IC8.40 IC8.41 IC8.42 IC8.43 IC8.44 IC8.45 IC8.46 IC8.47 IC8.48 IC8.49 J?.1@49.739,3.369 J?.6 LED1.2 LED3.2 LED5.2 LED7.2 P1.3 P2.1 P3.1 P?.1 P?.2 P?.14 P?.15 P?.16 Q?.2 R17_RS485-0.1 R17_RS485-1.1 R18_RS485-0.2 R18_RS485-1.2 R?.1@37.568,36.449 R?.2@42.648,15.991 R?.2@42.648,18.785 R?.2@42.648,21.579 R?.2@42.648,24.373 R?.2@47.752,15.991 R?.2@47.752,18.785 R?.2@47.752,21.579 R?.2@47.752,24.373 S1.2 S2.2 S3.2 Z?_U_EntradasAnalogicas1.2 Z?_U_EntradasAnalogicas2.2 Z?_U_EntradasAnalogicas3.2 Z?_U_EntradasAnalogicas4.2 Z?_U_EntradasAnalogicas5.2 Z?_U_EntradasAnalogicas6.2 Z?_U_EntradasAnalogicas7.2 Z?_U_EntradasAnalogicas8.2
  other v3: 56.9,16
GPIO0: IC8.27 P1.1 | length 37.6
  Top Layer w0.254: v1(22.225,41.402) 23.68,42.857 23.68,46.113 23.922,46.355 IC8.27@24.003,46.355
  Bottom Layer w0.254: P1.1 5.703,61.607 7.397,59.914 7.366,59.883 7.366,54.833 9.217,52.982 9.217,47.679 12.313,44.583 19.044,44.583 v1(22.225,41.402)
LED1: IC8.28 P?.10 R2.1 | length 41.7
  Top Layer w0.254: v1(22.733,45.085) IC8.28 ; R2.1 v1(42.741,44.831)
  Bottom Layer w0.254: v1(22.733,45.085) 23.622,45.974 41.656,45.974 42.741,44.889 v1(42.741,44.831) 43.688,44.831 P?.10
LED2: IC8.26 P?.11 R4.1 | length 38.7
  Top Layer w0.254: IC8.26 26.911,44.971 v1(26.924,44.958) ; R4.1 v1(42.741,42.037)
  Bottom Layer w0.254: v1(26.924,44.958) 39.878,44.958 42.741,42.095 v1(42.741,42.037) 45.548,42.037 53.848,33.737 53.848,32.131 P?.11
LED3: IC8.25 P?.12 R6.1 | length 38.2
  Top Layer w0.254: IC8.25 26.911,43.701 v1(26.924,43.688) ; R6.1 v1(42.661,39.243)
  Bottom Layer w0.254: v1(26.924,43.688) 38.1,43.688 v1@42.603,39.185 ; v1(42.661,39.243) 50.535,31.369 52.07,31.369 P?.12
LED4: IC8.24 P?.13 R9.1 | length 39.8
  Top Layer w0.254: IC8.24 26.911,42.431 v1(26.924,42.418) ; R9.1 v1(42.741,36.449)
  Bottom Layer w0.254: v1(26.924,42.418) 36.703,42.418 42.672,36.449 v1(42.741,36.449) 44.704,36.449 50.419,30.734 51.943,30.734 53.975,28.702 53.975,26.924 P?.13
NetD?_2: D?.2@38.88,43.561 K?.2 Q?.3 | length 14
  Top Layer w0.254: Q?.3 38.338,40.243 38.884,40.789 38.884,41.711 38.88,41.715 38.88,43.561 39.37,44.051 K?.2
NetK?_1: K?.1
NetK?_3: K?.3
NetK?_4: K?.4
NetLED1_1: LED1.1 R2.2 | length 3.4
  Top Layer w0.4: R2.2 LED1.1
NetLED3_1: LED3.1 R4.2 | length 3.4
  Top Layer w0.4: R4.2 LED3.1
NetLED5_1: LED5.1 R6.2 | length 3.4
  Top Layer w0.4: R6.2 LED5.1
NetLED7_1: LED7.1 R9.2 | length 3.4
  Top Layer w0.4: R9.2 LED7.1
NetQ?_1: Q?.1 R?.2@32.488,36.449 R?.2@34.568,36.449 | length 4.4
  Top Layer w0.254: R?.2@32.488,36.449 34.568,36.449 34.544,36.473 34.544,38.094 34.693,38.243 Q?.1
NetR?_1: R?.1@29.488,36.449
PULS2: C3.2 IC8.22 R7.1 S2.1 | length 36.7
  Top Layer w0.254: IC8.22 25.266,39.878 v1(26.924,39.878) ; R7.1 C3.2 ; v1(36.068,33.147) 34.723,33.147 C3.2 ; S2.1 43.792,31.496 35.924,31.496 34.688,32.732 C3.2
  Bottom Layer w0.254: v1(26.924,39.878) 25.019,39.878 24.003,38.862 24.003,36.576 26.797,33.782 35.433,33.782 v1(36.068,33.147)
PULS3: C4.2 IC8.23 R8.1 S3.1 | length 39.6
  Top Layer w0.254: IC8.23 25.266,41.148 v1(26.924,41.148) ; R8.1 C4.2 ; v1(36.068,29.972) 34.723,29.972 C4.2 ; S3.1 45.103,28.362 44.502,28.362 44.461,28.321 35.924,28.321 34.688,29.557 C4.2
  Bottom Layer w0.254: v1(26.924,41.148) 25.4,41.148 23.241,38.989 23.241,36.576 26.543,33.274 32.766,33.274 v1(36.068,29.972)
RST_0: IC3_RS485-0.2 IC3_RS485-0.3 IC8.38 R16_RS485-0.2 | length 20.8
  Top Layer w0.254: v1(9.144,60.245) IC3_RS485-0.2 IC3_RS485-0.3 10.414,58.216 10.86,57.77 10.86,55.966 R16_RS485-0.2 ; IC8.38@10.033,46.355 v1(10.033,48.387)
  Bottom Layer w0.254: v1(9.144,60.245) 9.133,60.245 8.255,59.367 8.255,54.864 10.033,53.086 v1(10.033,48.387)
RST_1: IC3_RS485-1.2 IC3_RS485-1.3 IC8.35 R16_RS485-1.2 | length 20.6
  Top Layer w0.254: IC8.35@13.843,46.355 IC8.35 v1(13.843,48.387) ; v1(14.997,60.221) 14.991,60.216 14.991,58.679 IC3_RS485-1.2 IC3_RS485-1.3 16.256,56.733 16.764,56.225 R16_RS485-1.2 R16_RS485-1.2@16.532,56.157
  Bottom Layer w0.254: v1(13.843,48.387) 13.843,59.233 14.746,60.136 14.912,60.136 v1(14.997,60.221)
RX_0: IC3_RS485-0.1 IC8.36 R14_RS485-0.2 | length 18.9
  Top Layer w0.254: IC3_RS485-0.1@7.874,58.434 7.874,58.216 9.321,56.769 v1(9.398,56.769) 9.398,53.618 9.779,53.237 R14_RS485-0.2 ; IC8.36@12.573,46.355 v1(12.573,48.387)
  Bottom Layer w0.254: v1(9.398,56.769) 12.573,53.594 v1(12.573,48.387)
RX_1: IC3_RS485-1.1 IC8.11 R14_RS485-1.2 | length 36.9
  Top Layer w0.254: IC3_RS485-1.1 13.716,57.553 13.865,57.404 14.732,57.404 15.251,56.885 v1(15.251,53.236) 15.273,53.258 R14_RS485-1.2 ; IC8.11@20.193,29.381 v1(20.193,31.115)
  Bottom Layer w0.254: v1(15.251,53.236) 15.251,50.916 23.622,42.545 23.622,40.259 21.082,37.719 21.082,32.004 v1(20.193,31.115)
SCL: IC8.17 P2.3 P3.3 | length 50.9
  Top Layer w0.254: P2.3@19.939,25.4 21.59,27.051 26.416,27.051 26.924,26.543 48.768,26.543 P3.3@52.451,22.86 ; IC8.17 26.784,33.541 27.686,32.639 v1(27.686,28.575)
  Bottom Layer w0.254: P2.3@19.939,25.4 21.717,27.178 26.289,27.178 v1(27.686,28.575)
SDA: IC8.16 P2.4 P3.4 | length 42.7
  Top Layer w0.254: P2.4@17.399,25.4 19.685,27.686 26.543,27.686 ; IC8.16 26.394,32.271 26.543,32.122 26.543,27.686 ; P3.4@52.451,25.4 50.759,27.092 50.685,27.166 27.063,27.166 26.543,27.686
Sw0: IC8.21 R?.1@39.648,15.991 S?.8 | length 42.8
  Top Layer w0.254: IC8.21 26.911,38.621 v1(26.924,38.608) ; S?.8 37.846,15.621 38.227,16.002 39.637,16.002 39.648,15.991 39.659,16.002 v1(41.148,16.002)
  Bottom Layer w0.254: v1(26.924,38.608) 34.29,38.608 43.942,28.956 43.942,18.796 v1(41.148,16.002)
Sw1: IC8.20 R?.1@44.752,15.991 S?.7 | length 47.5
  Top Layer w0.254: IC8.20 26.911,37.351 v1(26.924,37.338) ; S?.7 34.036,16.891 38.259,16.891 38.767,17.399 v1(41.164,17.399) 43.561,17.399 44.196,16.764 44.279,16.764 44.752,16.291 R?.1@44.752,15.991
  Bottom Layer w0.254: v1(26.924,37.338) 34.798,37.338 43.434,28.702 43.434,19.685 41.164,17.415 v1(41.164,17.399)
Sw2: IC8.19 R?.1@39.648,18.785 S?.6 | length 42.8
  Top Layer w0.254: IC8.19 26.911,36.081 v1(26.924,36.068) ; S?.6 32.004,17.399 36.576,17.399 37.454,18.277 R?.1@39.164,18.277 ; R?.1@39.648,18.785 39.659,18.796 v1(41.148,18.796)
  Bottom Layer w0.254: v1(26.924,36.068) 35.306,36.068 42.926,28.448 42.926,20.574 v1(41.148,18.796)
Sw3: IC8.18 R?.1@44.752,18.785 S?.5 | length 48.2
  Top Layer w0.254: IC8.18 26.911,34.811 v1(26.924,34.798) ; S?.5 29.972,17.907 35.941,17.907 38.227,20.193 v1(41.165,20.193) 43.517,20.193 44.752,18.958 R?.1@44.752,18.658
  Bottom Layer w0.254: v1(26.924,34.798) 35.814,34.798 42.418,28.194 42.418,21.446 v1(41.165,20.193)
Sw4: IC8.32 R?.1@39.648,21.579 S?.4 | length 58.3
  Top Layer w0.254: IC8.32@17.653,46.355 17.653,44.704 19.939,42.418 19.939,35.56 v2(22.098,33.401) ; S?.4 28.067,18.542 35.433,18.542 38.308,21.417 39.486,21.417 39.648,21.579 v1(41.148,21.579)
  Bottom Layer w0.254: v2(22.098,33.401) 22.098,31.496 24.13,29.464 30.988,29.464 38.873,21.579 v1(41.148,21.579)
Sw5: IC8.31 R?.1@44.752,21.579 S?.3 | length 64.4
  Top Layer w0.254: IC8.31@18.923,46.355 18.923,44.577 20.447,43.053 20.447,36.322 v2(22.098,34.671) ; S?.3 26.162,19.177 34.925,19.177 38.735,22.987 43.561,22.987 44.196,22.352 44.279,22.352 44.752,21.879 R?.1@44.752,21.325
  Bottom Layer w0.254: v2(22.098,34.671) 22.729,34.04 22.729,31.754 24.511,29.972 31.242,29.972 38.227,22.987 v1(41.148,22.987)
Sw6: IC8.30 R?.1@39.648,24.373 S?.2 | length 60.6
  Top Layer w0.254: S?.2 24.257,19.812 34.544,19.812 38.343,23.611 R?.1@39.164,23.611 ; IC8.30@20.193,46.355 20.193,44.958 20.955,44.196 20.955,36.957 v2(22.098,35.814) ; R?.1@39.648,24.373 v1(41.148,24.373)
  Bottom Layer w0.254: v2(22.098,35.814) 23.237,34.675 23.237,32.008 24.765,30.48 31.496,30.48 37.603,24.373 v1(41.148,24.373)
Sw7: IC8.29 R?.1@44.752,24.373 S?.1 | length 67.7
  Top Layer w0.254: S?.1 22.352,20.447 34.163,20.447 38.354,24.638 38.354,25.273 38.862,25.781 v1(41.148,25.781) 43.644,25.781 44.752,24.673 R?.1@44.752,24.373 ; IC8.29@21.463,46.355 21.463,37.592 v2(22.098,36.957)
  Bottom Layer w0.254: v2(22.098,36.957) 23.749,35.306 23.749,32.214 24.848,31.115 31.623,31.115 36.957,25.781 v1(41.148,25.781)
TX_0: IC3_RS485-0.4 IC8.37 R18_RS485-0.1 | length 13.5
  Top Layer w0.254: IC8.37@11.303,46.355 11.303,48.133 10.922,48.514 R18_RS485-0.1 11.811,50.57 11.992,50.751 11.992,56.969 11.684,57.277 IC3_RS485-0.4
TX_1: IC3_RS485-1.4 IC8.10 R18_RS485-1.1 | length 37.5
  Top Layer w0.254: v1(14.968,49.911) 15.753,50.696 16.659,50.696 R18_RS485-1.1 17.758,50.591 17.907,50.74 17.907,57.195 17.526,57.576 IC3_RS485-1.4 ; IC8.10@18.923,29.109 v1(18.923,31.115)
  Bottom Layer w0.254: v1(14.968,49.911) 15.089,49.911 15.279,49.721 15.303,49.721 23.114,41.91 23.114,40.767 20.32,37.973 20.32,32.512 v1(18.923,31.115)
USB_D+: IC8.14 P1.4 | length 41
  Top Layer w0.254: v1(7.874,33.528) 9.017,32.385 21.717,32.385 24.003,30.099 IC8.14@24.003,28.855
  Bottom Layer w0.254: P1.4 7.874,51.816 v1(7.874,33.528)
USB_D-: IC8.13 P1.5 | length 38.9
  Top Layer w0.254: v1(7.112,31.877) 21.336,31.877 22.733,30.48 IC8.13@22.733,28.855
  Bottom Layer w0.254: P1.5 7.112,50.038 v1(7.112,31.877)
pads on no net: IC8.33 IC8.34 IC8.39 P?.5 P?.6 P?.7 P?.8 P?.9
copper on no net: | length 0
  Top Layer w0.4: v3@7.1,16.5 v3@7.105,16.505
  other v1: 11.049,33.782 12.446,33.782 13.843,33.782 15.24,33.782 16.637,33.782 17.907,33.782 19.177,33.782 11.049,35.052 12.446,35.052 17.907,35.052 19.177,35.052 11.049,36.449 12.446,36.449 17.907,36.449 19.177,36.449 11.049,37.846 12.446,37.846 17.907,37.846 19.177,37.846 11.049,39.37 12.446,39.37 13.843,39.37 15.24,39.37 16.637,39.37 17.907,39.37 19.177,39.37 11.049,40.767 12.446,40.767 13.843,40.767 15.24,40.767 16.637,40.767 17.907,40.767 19.177,40.767 11.049,42.164 12.446,42.164 13.843,42.164 15.24,42.164 16.637,42.164 17.907,42.164
  other v3: 4.2,16 7.1,16 4.2,66

## Silkscreen, mask and mechanical layers (free items; w line width, h text height)
Top Overlay:
  lines w0.254: -2.464,41 0.003,41 ; 32,-3.613 32,0
  lines w0.4: 64,0 0,0 ; 0,0 0,82 ; 0,0 57,0 57,82 0,82 ; 0,82 0,82
Bottom Overlay:
  drawing of 954 lines, arcs and shapes, not listed
  text "V2.23" at 86.309,46.38 h1.52
  text "WWW.INELCOINGENIERIA.COM.AR" at 100.838,44.323 h1.52

## Dimensions
-2.464,41 to 4.2,16 on Top Overlay
4.2,66 to -2.464,41 on Top Overlay
34.499,3.369 to 32,-3.613 on Top Overlay
0,82 to 0,0 on Top Overlay
0,0 to 64,0 on Top Overlay
7.1,16 to 0,0 on Top Overlay
4.2,16 to 0,0 on Top Overlay
0,0 to 57,0 on Top Overlay